# Altium PCB WOLF-Adapter_V2.PcbDoc
Units mm, origin at the board's own origin, x right, y up, seen from the top; angles counter-clockwise.
Board outline 81.7 x 100.2 mm, 2 copper layers (Top Layer, Bottom Layer); 67 components, 74 nets, 317 pads, 127 vias.
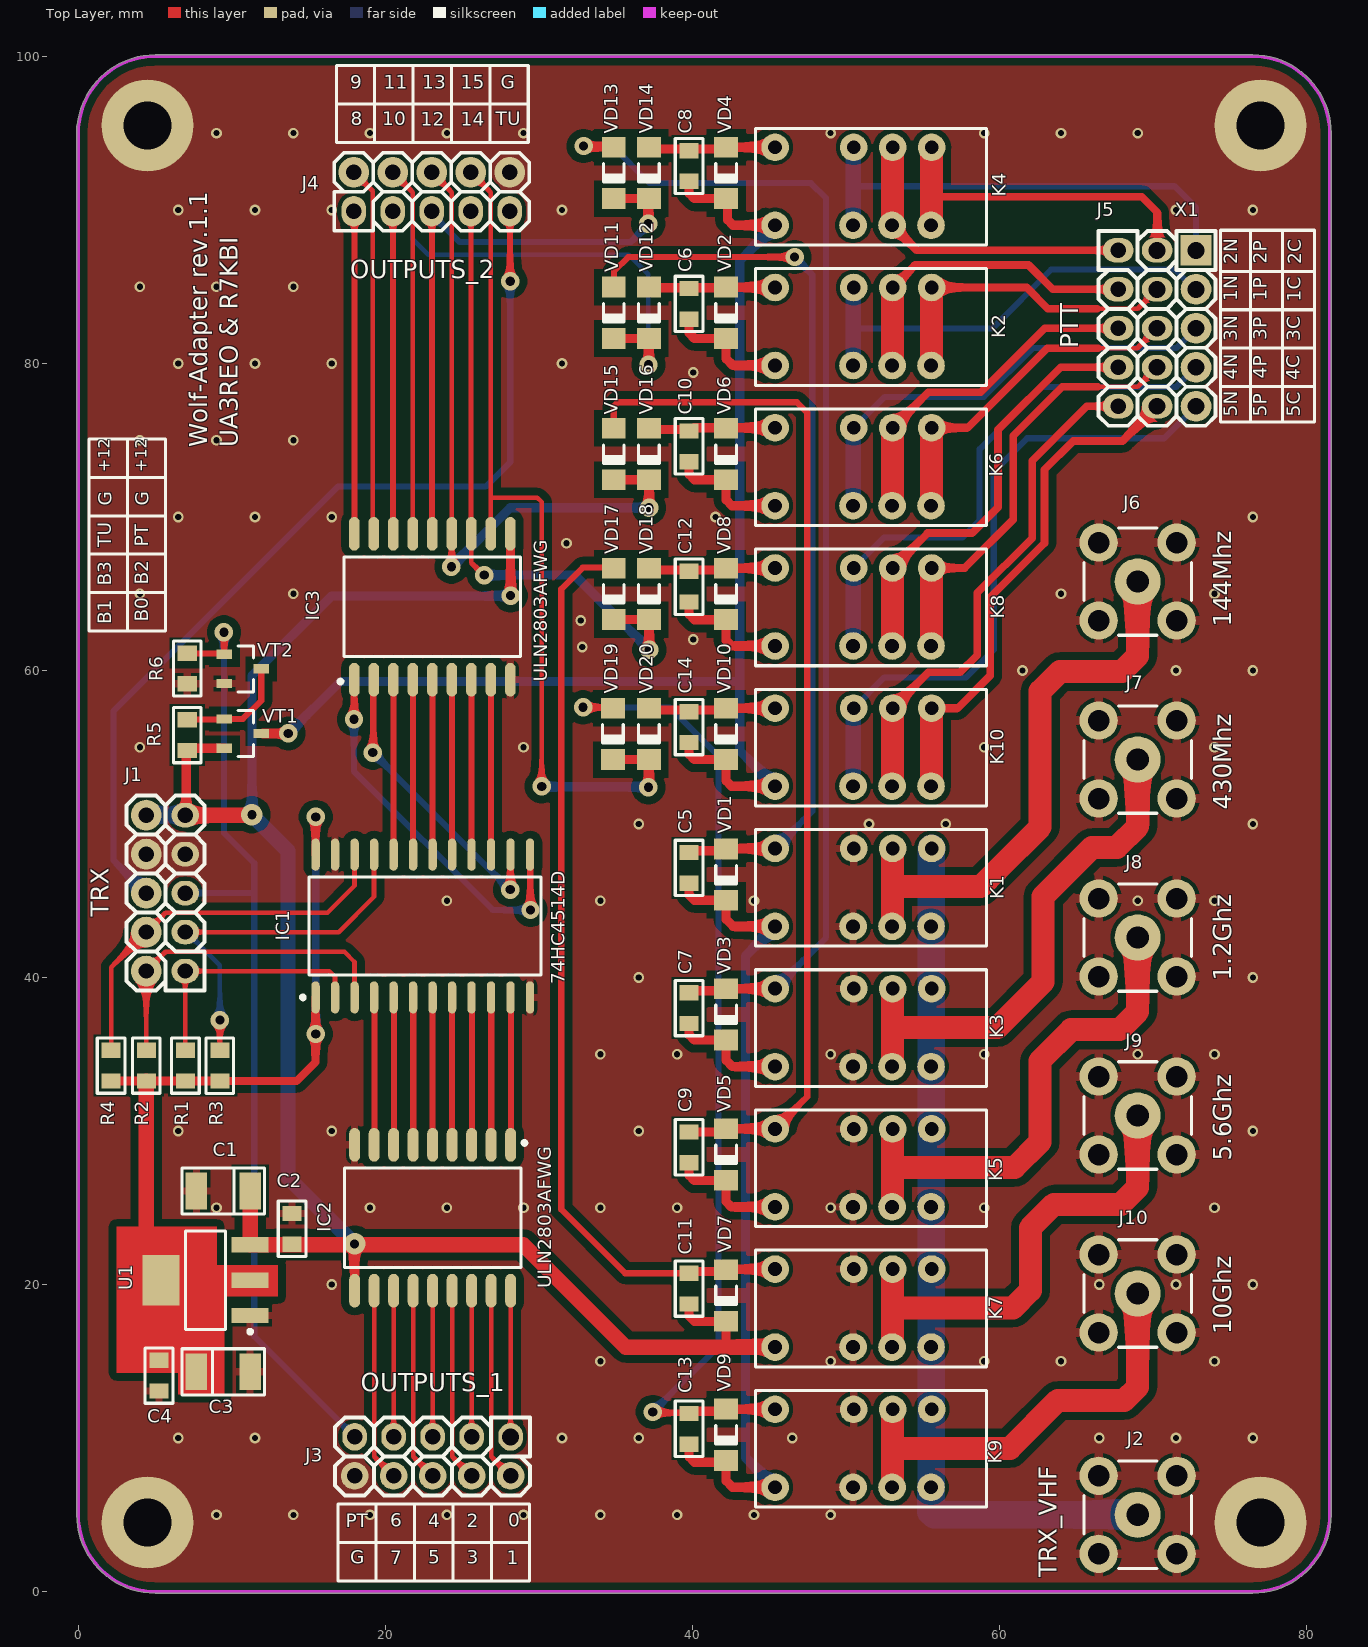
[diagram p0: Top Layer view]
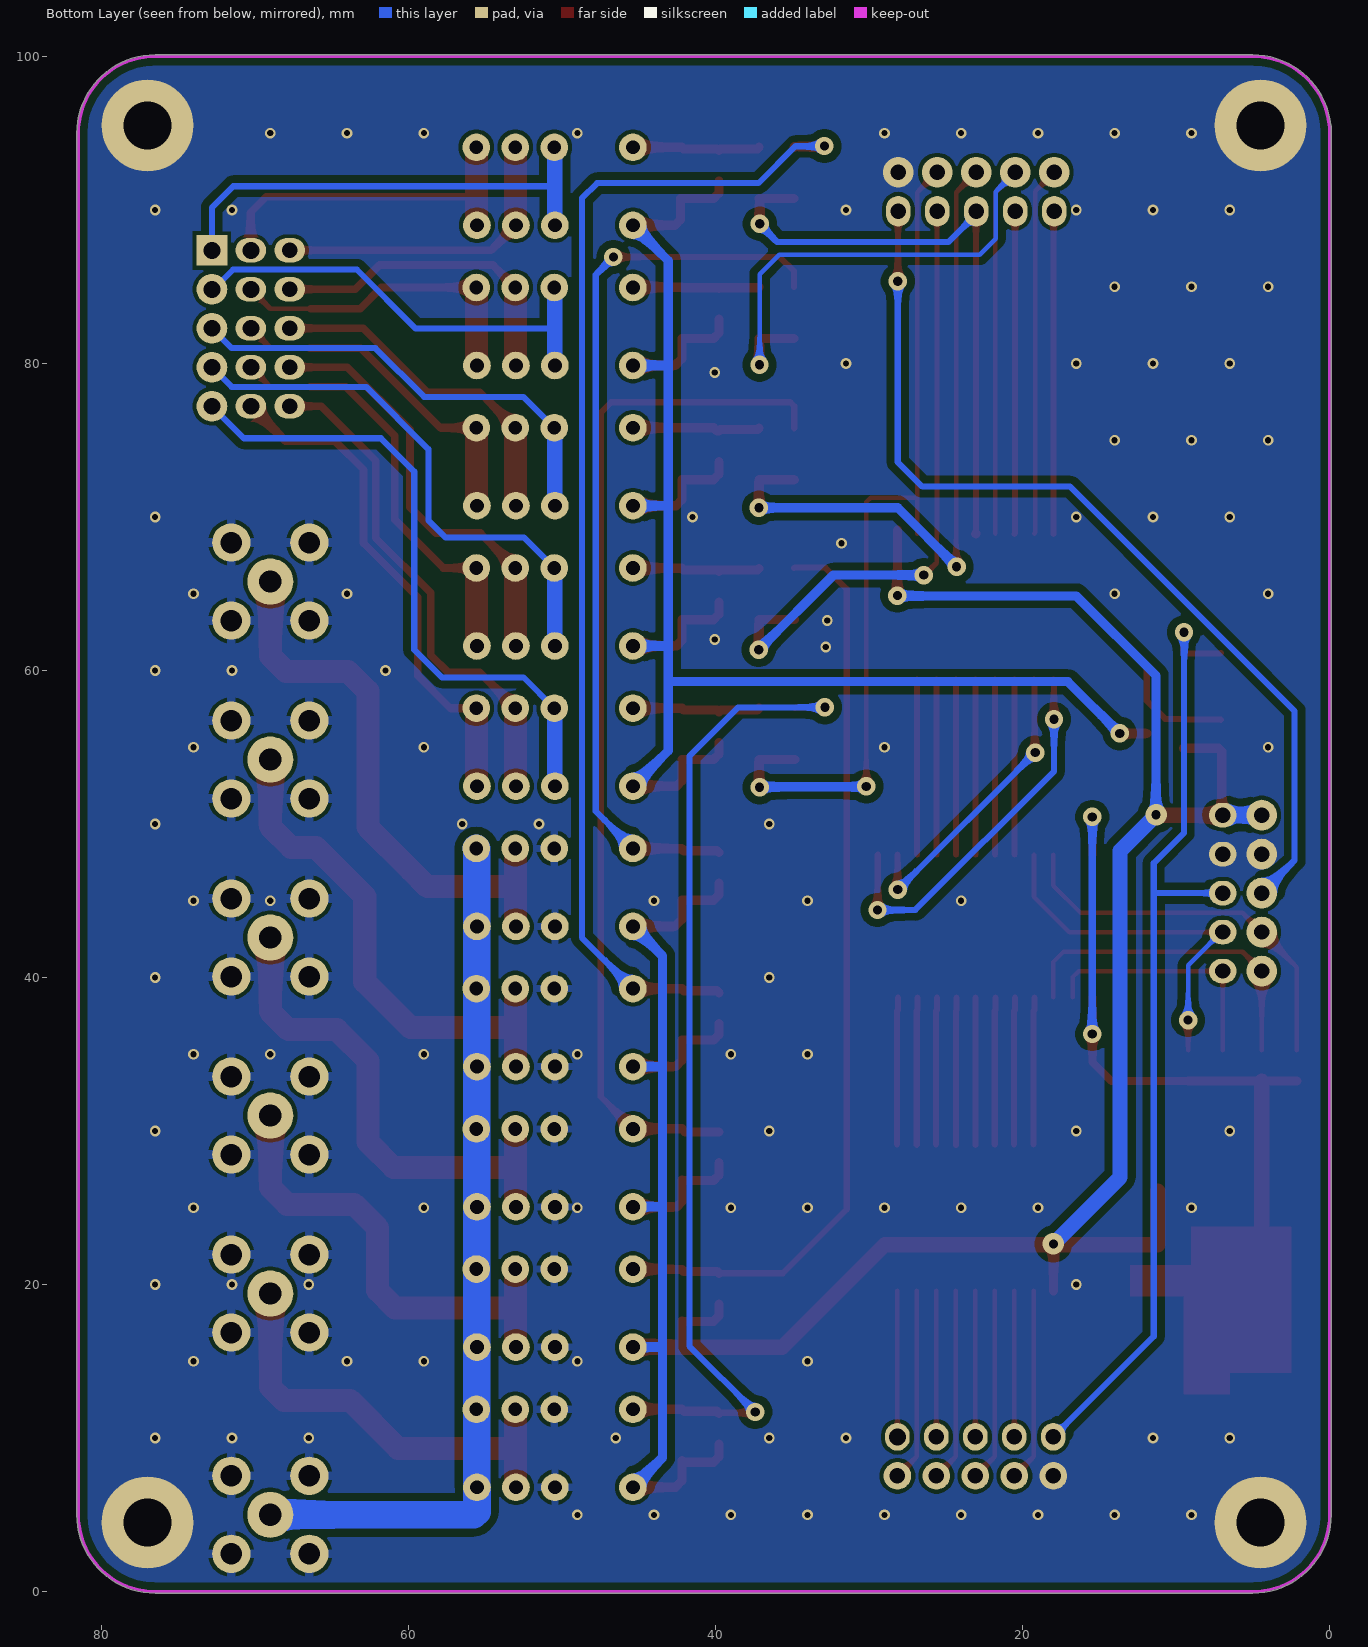
[diagram p1: Bottom Layer view, seen from below]
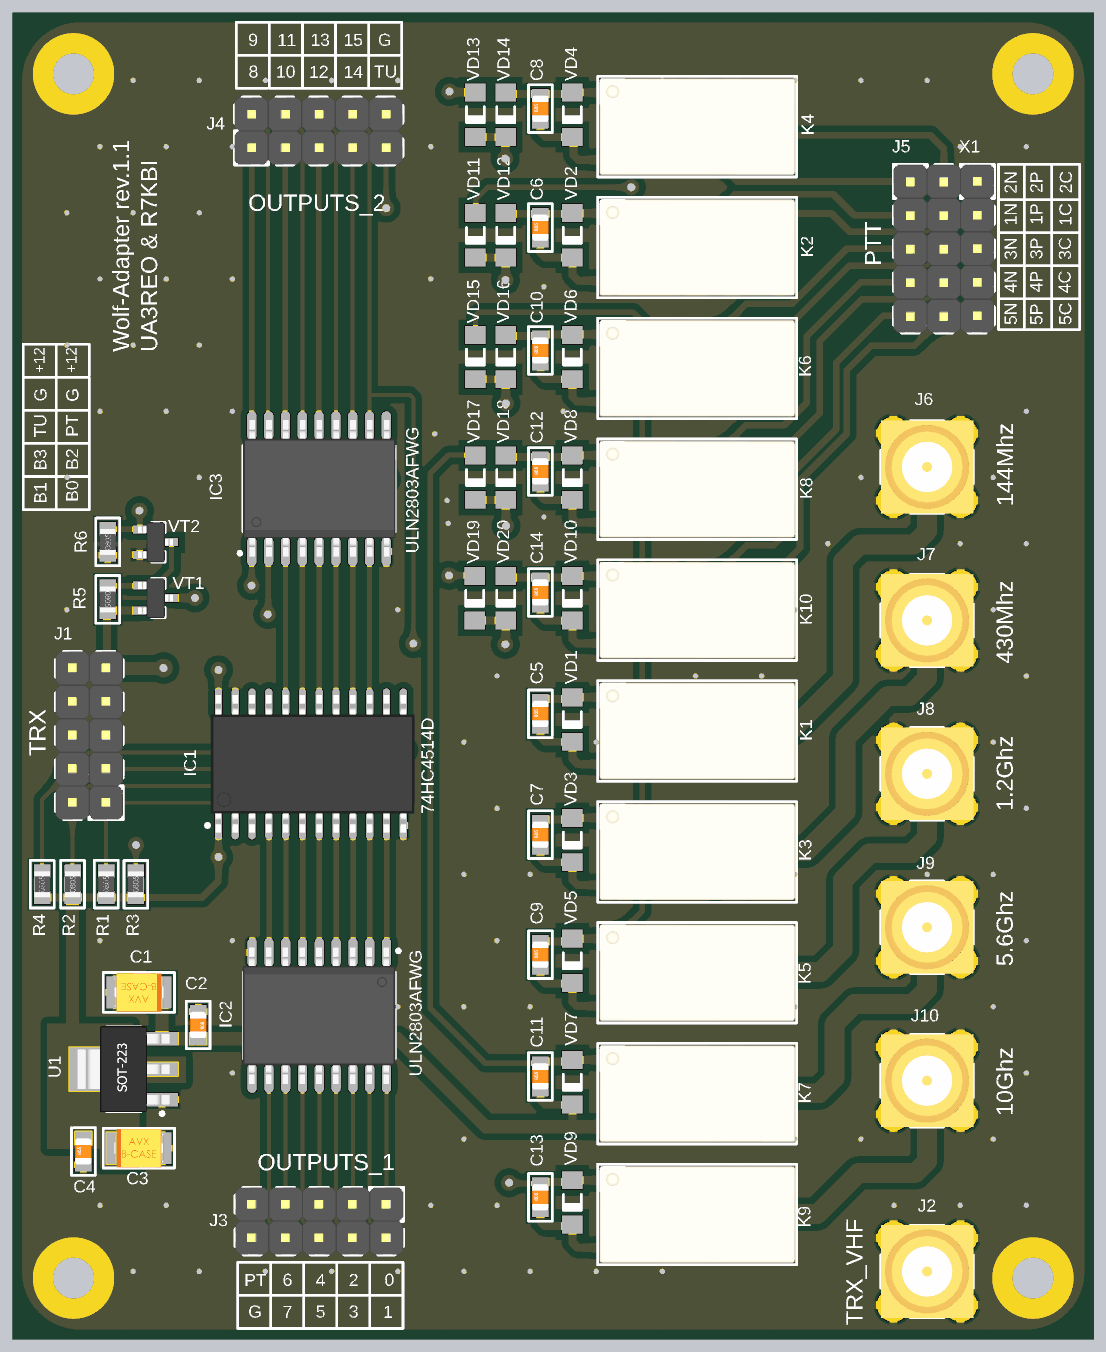
[diagram p2: 3D render of the assembled board from above, using the file's embedded part models]

## Layer stack, top to bottom
Top Solder: solder mask 0.0102, Solder Resist, Dk 3.5
Top Layer: signal copper 0.0356
Dielectric 1: dielectric 0.32, FR-4, Dk 4.8
Bottom Layer: signal copper 0.0356
Bottom Solder: solder mask 0.0102, Solder Resist, Dk 3.5

## Board outline
-0.1,4.999 -0.1,95.469 -0.072,95.539 cw(c5,95) 5,100.1 76.5,100.1 76.501,100.1 cw(c76.5,95) 81.6,95 81.6,5 cw(c76.5,5) 76.5,-0.1 5,-0.1 cw(c5,5)

## Design rules (kind name [scope] priority, off if disabled: settings)
BoardOutlineClearance [All] p1: gap=0.3 ignorepadtopadclearanceinfootprint=FALSE
Clearance POWER [InNetClass('POWER')] p1: gap=0.3 ignorepadtopadclearanceinfootprint=FALSE except(0: Arc-Hole Track-Hole SMDPad-Hole THPad-Hole Via-Hole Fill-Hole Poly-Hole Region-Hole Text-Hole)
Clearance Clearance_NPTH [All vs InPadClass('NPTH')] p2: gap=0.4 ignorepadtopadclearanceinfootprint=FALSE except(0: Arc-Hole Track-Hole SMDPad-Hole THPad-Hole Via-Hole Fill-Hole Poly-Hole Region-Hole Text-Hole)
Clearance Clearance_MultiLayerPad [OnLayer('Multi-Layer') and IsPad] p3: gap=0.25 ignorepadtopadclearanceinfootprint=FALSE except(0: Arc-Hole Track-Hole SMDPad-Hole THPad-Hole Via-Hole Fill-Hole Poly-Hole Region-Hole Text-Hole)
Clearance Clearance_Polygon [InPolygon] p4: gap=0.5 ignorepadtopadclearanceinfootprint=FALSE except(0: Arc-Hole Track-Hole SMDPad-Hole THPad-Hole Via-Hole Fill-Hole Poly-Hole Region-Hole Text-Hole)
Clearance [All] p5: gap=0.3 ignorepadtopadclearanceinfootprint=FALSE except(0: Arc-Hole Track-Hole SMDPad-Hole THPad-Hole Via-Hole Fill-Hole Poly-Hole Region-Hole Text-Hole)
Height [All] p1: minheight=0 maxheight=60 prefheight=12.7
HoleSize [All] p1: absolutevalues=TRUE maxlimit=5 minlimit=0.025 maxpercent=80.000 minpercent=20.000
HoleToHoleClearance [All] p1: gap=0.2 allowstackedmicrovias=TRUE
MinimumSolderMaskSliver [All] p1: minsoldermaskwidth=0.05
PlaneClearance [All] p1: clearance=0.5
PlaneConnect [All] p1: planeconnectstyle=Relief reliefexpansion=0.5 reliefentries=4 reliefconductorwidth=0.3 reliefairgap=0.2
PolygonConnect PolygonConnect_PowerPAD [All vs InPadClass('PowerPAD')] p1: connectstyle=Relief reliefconductorwidth=1 reliefentries=4 polygonreliefangle="90 Angle" airgapwidth=0.3
PolygonConnect PolygonConnect_PadGND [InNet('GND') and IsPad] p2: connectstyle=Relief reliefconductorwidth=0.5 reliefentries=4 polygonreliefangle="90 Angle" airgapwidth=0.2
PolygonConnect PolygonConnect_Via [IsVia] p3: connectstyle=Direct reliefconductorwidth=0.254 reliefentries=4 polygonreliefangle="90 Angle" airgapwidth=0.254
PolygonConnect [All] p4: connectstyle=Relief reliefconductorwidth=0.6 reliefentries=4 polygonreliefangle="90 Angle" airgapwidth=0.3
RoutingVias [All] p1: holewidth=0.3 width=0.7 viastyle="Through Hole" minholewidth=0.3 minwidth=0.6 maxholewidth=3.2 maxwidth=5
SilkToSilkClearance [All] p1: silktosilkclearance=0
SilkToSolderMaskClearance [IsPad] p1: minsilkscreentomaskgap=0.05 clearancetoexposedcopper=FALSE
SolderMaskExpansion [All] p1: expansion=0.075 istentingtop=FALSE
Width [All] p1: maxlimit=10 minlimit=0.15 preferedwidth=0.2
22 further rules are at their usual default settings.

## Components (designator, comment, footprint, x,y, rotation, side; value= is the part's Value field where it differs from the comment)
C1 "10uF" TANTAL_B 9.434,26.09 r180 top
C2 "0.1u" CH0805C 13.916,23.629 r270 top
C3 "10uF" TANTAL_B 9.434,14.317 r0 top
C4 "0.1u" CH0805C 5.248,14.067 r90 top
C5 "100n" CH0805C 39.778,47.139 r90 top
C6 "100n" CH0805C 39.778,83.881 r90 top
C7 "100n" CH0805C 39.778,38.005 r90 top
C8 "100n" CH0805C 39.778,92.865 r90 top
C9 "100n" CH0805C 39.778,28.939 r90 top
C10 "100n" CH0805C 39.778,74.603 r90 top
C11 "100n" CH0805C 39.778,19.737 r90 top
C12 "100n" CH0805C 39.778,65.456 r90 top
C13 "100n" CH0805C 39.778,10.603 r90 top
C14 "100n" CH0805C 39.778,56.312 r90 top
IC1 "74HC4514D" "24-SOIC (W)" 22.432,43.354 r90 top
IC2 "ULN2803AFWG" "18-SOIC (W)" 23.072,24.351 r270 top
IC3 "ULN2803AFWG" "18-SOIC (W)" 23.055,64.153 r90 top locked
J1 "\"TRX\"" "CON: PLD-10"#1 5.685,45.5 r90 top
J2 "\"TRX_VHF\"" "CON: SMA" 69,5 r0 top
J3 "\"OUTPUTS_1\"" "CON: PLD-10"#2 23.072,8.808 r180 top
J4 "\"OUTPUTS_2\"" "CON: PLD-10"#3 23.014,91.184 r0 top
J5 "\"PTT\"" "CON: PLD-10"#4 69,82.289 r270 top
J6 "\"144Mhz\"" "CON: SMA" 69,65.795 r0 top
J7 "\"430Mhz\"" "CON: SMA" 69,54.2 r0 top
J8 "\"1.2Ghz\"" "CON: SMA" 69,42.606 r0 top
J9 "\"5.6Ghz\"" "CON: SMA" 69,31.011 r0 top
J10 "\"10Ghz\"" "CON: SMA" 69,19.416 r0 top
K1 "G6S-2-DС12" G6S-2-DC12 44.24,47.139 r0 top
K2 "G6S-2-DС12" G6S-2-DC12 44.24,83.676 r0 top
K3 "G6S-2-DС12" G6S-2-DC12 44.24,38.005 r0 top
K4 "G6S-2-DС12" G6S-2-DC12 44.24,92.81 r0 top
K5 "G6S-2-DС12" G6S-2-DC12 44.24,28.871 r0 top
K6 "G6S-2-DС12" G6S-2-DC12 44.24,74.542 r0 top
K7 "G6S-2-DС12" G6S-2-DC12 44.24,19.737 r0 top
K8 "G6S-2-DС12" G6S-2-DC12 44.24,65.408 r0 top
K9 "G6S-2-DС12" G6S-2-DC12 44.24,10.603 r0 top
K10 "G6S-2-DС12" G6S-2-DC12 44.24,56.274 r0 top
R1 "1k" CH0805R 6.971,34.262 r90 top
R2 "1k" CH0805R 4.428,34.262 r90 top
R3 "1k" CH0805R 9.213,34.259 r90 top
R4 "1k" CH0805R 2.129,34.262 r90 top
R5 "30k" CH0805R 7.089,55.791 r270 top
R6 "10k" CH0805R 7.089,60.133 r90 top
U1 "LM1117DT-5-5.0" SOT223 8.287,20.284 r180 top
VD1 "1N4148" 1N4148 42.189,46.704 r270 top
VD2 "1N4148" 1N4148 42.189,83.299 r270 top
VD3 "1N4148" 1N4148 42.189,37.598 r270 top
VD4 "1N4148" 1N4148 42.189,92.415 r270 top
VD5 "1N4148" 1N4148 42.189,28.475 r270 top
VD6 "1N4148" 1N4148 42.189,74.1 r270 top
VD7 "1N4148" 1N4148 42.189,19.292 r270 top
VD8 "1N4148" 1N4148 42.189,64.989 r270 top
VD9 "1N4148" 1N4148 42.189,10.214 r270 top
VD10 "1N4148" 1N4148 42.189,55.872 r270 top
VD11 "1N4148" 1N4148 34.87,83.299 r270 top
VD12 "1N4148" 1N4148 37.161,83.299 r270 top
VD13 "1N4148" 1N4148 34.87,92.415 r270 top
VD14 "1N4148" 1N4148 37.161,92.415 r270 top
VD15 "1N4148" 1N4148 34.87,74.1 r270 top
VD16 "1N4148" 1N4148 37.161,74.1 r270 top
VD17 "1N4148" 1N4148 34.87,64.989 r270 top
VD18 "1N4148" 1N4148 37.161,64.989 r270 top
VD19 "1N4148" 1N4148 34.814,55.872 r270 top
VD20 "1N4148" 1N4148 37.161,55.872 r270 top
VT1 "IRLML9301" SOT23_132 10.708,55.891 r0 top
VT2 "BSS123" SOT23_132 10.708,60.108 r0 top
X1 "\"PTT\"" "CON: PLS-5" 72.801,82.289 r270 top

## Footprints (in the part's own frame and the unit in brackets; to place one, negate y for a bottom-side part, rotate by r counter-clockwise, add the part's x,y. Pads: shape width x height; smd on the part's side, far side on the other; paste and mask are expansions set on the pad)
1N4148 [mm] "MELF Diode, 2-Leads, Body 3,60x1,30mm, IPC Medium Density"
  rect 1.35x1.55 smd: 1(-1.675,0) 2(1.675,0)
  silkscreen extent -0.6,-0.67 0.6,0.68, body extent -1.7,-0.7 1.7,0.7, height 1.36
"18-SOIC (W)" [mm] "SOIC, 18-Leads, Body 11,55x7,50mm, Pitch 1,27mm, IPC Medium Density"
  oval 2.2x0.7 smd: 1(-4.75,5.08) 2(-4.75,3.81) 3(-4.75,2.54) 4(-4.75,1.27) 5(-4.75,0) 6(-4.75,-1.27) 7(-4.75,-2.54) 8(-4.75,-3.81) 9(-4.75,-5.08) 10(4.75,-5.08) 11(4.75,-3.81) 12(4.75,-2.54) 13(4.75,-1.27) 14(4.75,0) 15(4.75,1.27) 16(4.75,2.54) 17(4.75,3.81) 18(4.75,5.08)
  round 0.7 on Mech1: 32(-4.5,5.1)
  silkscreen extent -5,-5.75 3.25,6.11, body extent -5.12,-5.79 5.18,5.74, height 2.65
"24-SOIC (W)" [mm] "SOIC, 24-Leads, Body 15,30x7,55mm, Pitch 1,27mm, IPC Medium Density"
  oval 2.1x0.55 smd: 1(-4.65,6.985) 2(-4.65,5.715) 3(-4.65,4.445) 4(-4.65,3.175) 5(-4.65,1.905) 6(-4.65,0.635) 7(-4.65,-0.635) 8(-4.65,-1.905) 9(-4.65,-3.175) 10(-4.65,-4.445) 11(-4.65,-5.715) 12(-4.65,-6.985) 13(4.65,-6.985) 14(4.65,-5.715) 15(4.65,-4.445) 16(4.65,-3.175) 17(4.65,-1.905) 18(4.65,-0.635) 19(4.65,0.635) 20(4.65,1.905) 21(4.65,3.175) 22(4.65,4.445) 23(4.65,5.715) 24(4.65,6.985)
  round 0.5 on Mech1: ""(-4.6,6.9)
  silkscreen extent -4.77,-7.7 3.2,7.93, body extent -5.2,-7.83 5.2,7.57, height 2.6
CH0805C [mm] "Chip Capacitor, 2-Leads, Body 2,00x1,20mm, IPC Medium Density"
  rect 1x1.25 smd: 1(-1,0) 2(1,0)
  silkscreen extent -1.8,-0.9 1.8,0.9, body extent -1,-0.62 1,0.63, height 0.78
CH0805R [mm]
  rect 1x1.25 smd: 1(-1,0) 2(1,0)
  silkscreen extent -1.8,-0.9 1.8,0.9, body extent -1,-0.6 1,0.6, height 0.44
"CON: PLD-10"#1 [mm]
  oval 1.6x1.8 hole 1: 1(-5.08,-1.27) 3(-2.54,-1.27) 5(0,-1.27) 7(2.54,-1.27) 9(5.08,-1.27)
  round 2 hole 1: 2(-5.08,1.27) 4(-2.54,1.27) 6(0,1.27) 8(2.54,1.27) 10(5.08,1.27)
  silkscreen extent -6.35,-2.54 6.35,2.54, body extent -6.35,-2.54 6.35,2.54, height 8.54
"CON: PLD-10"#2 [mm]
  oval 1.6x1.8 hole 1.1: 1(-5.08,-1.27)
  round 1.8 hole 1: 2(-5.08,1.27) 4(-2.54,1.27) 6(0,1.27) 8(2.54,1.27) 10(5.08,1.27)
  oval 1.6x1.8 hole 1: 3(-2.54,-1.27) 5(0,-1.27) 7(2.54,-1.27) 9(5.08,-1.27)
  silkscreen extent -6.35,-2.54 6.35,2.54, body extent -6.35,-2.54 6.35,2.54, height 8.54
"CON: PLD-10"#3 [mm]
  oval 1.6x2 hole 1: 1(-5.08,-1.27) 3(-2.54,-1.27) 5(0,-1.27) 7(2.54,-1.27) 9(5.08,-1.27)
  round 2 hole 1: 2(-5.08,1.27) 4(-2.54,1.27) 6(0,1.27) 8(2.54,1.27) 10(5.08,1.27)
  silkscreen extent -6.35,-2.54 6.35,2.54, body extent -6.35,-2.54 6.35,2.54, height 8.54
"CON: PLD-10"#4 [mm]
  oval 1.6x2 hole 1: 1(-5.08,-1.27) 3(-2.54,-1.27) 5(0,-1.27) 7(2.54,-1.27) 9(5.08,-1.27)
  oval 1.6x2 hole 1.1: 2(-5.08,1.27) 4(-2.54,1.27) 6(0,1.27) 8(2.54,1.27) 10(5.08,1.27)
  silkscreen extent -6.35,-2.54 6.35,2.54, body extent -6.35,-2.54 6.35,2.54, height 8.54
"CON: PLS-5" [mm]
  rect 2x2 hole 1.1: 1(-5.08,0)
  round 2 hole 1.1: 2(-2.54,0) 3(0,0) 4(2.54,0) 5(5.08,0)
  silkscreen extent -6.35,-1.27 6.35,1.27, body extent -6.35,-1.27 6.35,1.27, height 8.54
"CON: SMA" [mm]
  round 3 hole 1.45: 1(0,0)
  round 2.5 hole 1.4: 2(-2.54,-2.54) 2(-2.54,2.54) 2(2.54,-2.54) 2(2.54,2.54)
  silkscreen extent -3.5,-3.5 3.5,3.5, body extent -3.5,-3.5 3.5,3.5, height 9.53
G6S-2-DC12 [mm]
  round 1.8 hole 0.9: 1(1.14,1.27) 3(6.261,1.27) 4(8.801,1.27) 5(11.341,1.27) 8(11.3,-3.81) 9(8.76,-3.81) 10(6.22,-3.81) 12(1.14,-3.81)
  silkscreen extent -0.14,-5.1 14.9,2.5, body extent 0,-4.95 14.8,2.35, height 8.55
SOT23_132 [mm] "SOT23, 3-Leads, Body 3,0x2,6mm (max), Pitch 0,95mm, IPC Medium Density"
  rect 1x0.6 smd: 1(-1.2,0.95) 2(-1.2,-0.95) 3(1.2,0)
  round 0.5 on Mech1: ""(-0.9,1.1)
  silkscreen extent -0.3,-1.5 0.7,1.5, body extent -1.32,-1.52 1.32,1.52, height 1.12
SOT223 [mm] "SOT223, 4-Leads, Body 6,50x7,00mm (avg), Pitch 2,30mm, IPC Medium Density"
  rect 2.4x1 smd: 1(-2.9,2.3) 2(-2.9,0) 3(-2.9,-2.3)
  rect 2.4x3.3 smd: 4(2.9,0)
  round 0.5 on Mech1: ""(-3,2.7)
  silkscreen extent -3.03,-3.2 1.3,3.47, body extent -3.48,-3.25 3.48,3.25, height 1.65
TANTAL_B [mm]
  rect 1.4x2.4 smd: 1(-1.75,0) 2(1.75,0)
  round 0.5 on Mech1: ""(-1.4,1)
  silkscreen extent -2.7,-1.5 2.7,1.5, body extent -1.85,-1.46 1.85,1.47, height 2.03

## Part data
C1 C3: library part TantalCap
C2 C4 C5 C6 C7 C8 C9 C10 C11 C12 C13 C14: library part Capacitor
J1 J3 J4 J5: library part 10-Connector
J2 J6 J7 J8 J9 J10: library part SMA, "RF"
K1 K2 K3 K4 K5 K6 K7 K8 K9 K10: library part G6S-2_TRS
R1 R2 R3 R4 R5 R6: library part Resistor
U1: library part AMS117
VD1 VD2 VD3 VD4 VD5 VD6 VD7 VD8 VD9 VD10 VD11 VD12 VD13 VD14 VD15 VD16 VD17 VD18 VD19 VD20: library part Diod
VT1: library part P-KANAL
VT2: library part N-KANAL
X1: library part 5-Connector

## Free pads (board coordinates)
  round 6 hole 3.1: 0(4.5,4.5) 0(4.5,95.5) 0(77,4.5) 0(77,95.5)

## Via types
v1: diameter 0.7, hole 0.4, Top Layer to Bottom Layer, tented both sides, 102 vias
v2: diameter 1.2, hole 0.6, Top Layer to Bottom Layer, tented both sides, 23 vias
v3: diameter 1.4, hole 0.6, Top Layer to Bottom Layer, tented both sides, 2 vias

## Nets (pads, with @x,y where several pads share a name; then routed paths per layer and width w, separated by ;. In a path a pad name is that pad's centre, name@x,y a point inside that pad or via, vN(x,y) a via of type N, cw(c..) or ccw(c..) an arc to the next point about the centre after c; other vN are vias at no path point)
+5V: C3.1 C4.2 IC1.1 IC1.24 R1.1 R2.1 R3.1 R4.1 U1.2 U1.4 | length 50.7
  Top Layer w0.5: R3.1 14.209,33.259 15.447,34.497 IC1.1 ; IC1.24 15.447,50.397 v2@15.45,50.4
  Top Layer w0.6: R4.1 2.13,33.26 4.428,33.26 9.211,33.26 R3.1
  Top Layer w1: R2.1 4.428,33.26 4.428,22.997 4.5,22.925 ; U1.4 U1.2
  Bottom Layer w0.5: v2(15.46,36.321) v2(15.46,50.46)
+12V: C1.1 C2.2 C5.1 C7.1 C9.1 C11.1 C13.1 IC2.10 IC3.10 J1.9 J1.10 K1.12 K3.12 K5.12 K7.12 K9.12 R5.2 U1.3 VD1.2 VD3.2 VD5.2 VD7.2 VD9.2 VT1.2 | length 200.9
  Top Layer w0.6: J1.9@6.97,50.565 J1.9 7.022,50.647 7.022,54.724 R5.2 7.239,54.941 VT1.2 ; v3@11.285,50.565 v3@11.3,50.55 ; IC2.10 v3(17.992,22.642) ; IC3.10@28.139,69.141 28.144,69.135 28.144,64.966 v2@28.153,64.957 ; C13.1 39.778,8.776 40.13,8.425 42.075,8.425 VD9.2 42.189,7.211 42.607,6.793 K9.12 ; C11.1 39.778,17.951 40.13,17.6 42.171,17.6 VD7.2 42.189,16.386 ; C9.1 39.778,27.126 40.13,26.775 42.163,26.775 VD5.2 42.189,25.401 42.54,25.05 45.369,25.05 K5.12 ; C7.1 39.778,36.274 40.13,35.923 VD3.2 42.189,34.611 42.605,34.195 K3.12 ; C5.1 39.778,45.38 40.13,45.029 VD1.2 42.189,43.786 42.646,43.329 K1.12
  Top Layer w1: J1.9@6.97,50.565 v3@11.285,50.565 ; C1.1 11.186,26.089 U1.3 U1.3 17.88,22.584 17.938,22.642 v3(17.992,22.642) ; v3@18.044,22.59 28.985,22.59 35.648,15.927 42.648,15.927 K7.12
  Bottom Layer w0.6: v3@11.3,50.55 v3(11.3,50.6) 11.3,59.66 16.497,64.857 28.053,64.857 v2@28.153,64.957 ; K9.12 43.45,8.723 43.45,15.925 ; K7.12 43.452,15.927 43.45,15.925 ; K5.12 43.461,25.061 43.45,25.05 ; K3.12 43.495,34.195 43.45,34.15 ; K1.12 43.45,41.399 43.45,34.15 ; 43.45,15.925 43.45,25.05 ; 43.45,25.05 43.45,34.15
  Bottom Layer w1: J1.10@4.746,50.6 J1.9@7.286,50.6 ; v3(11.3,50.6) 13.65,48.25 13.65,26.984 v3(17.992,22.642)
  other v2: 28.153,64.882
BAND_0: IC1.2 J1.1 R1.2 | length 16.4
  Top Layer w0.3: R1.2 6.955,35.277 J1.1 16.33,40.42 16.717,40.033 IC1.2
BAND_1: IC1.3 J1.2 R2.2 | length 21.8
  Top Layer w0.3: R2.2 4.415,35.275 J1.2 5.665,41.67 17.33,41.67 17.987,41.013 IC1.3
BAND_2: IC1.21 J1.3 R3.2 | length 24.4
  Top Layer w0.3: J1.3 16.96,42.96 19.257,45.257 IC1.21 ; v2@9.2,36.975 9.213,36.962 R3.2
  Bottom Layer w0.3: J1.3 7.055,42.96 9.219,40.797 v2(9.219,37.229)
BAND_3: IC1.22 J1.4 R4.2 | length 25.5
  Top Layer w0.3: R4.2 2.129,40.674 J1.4 5.68,44.225 16.225,44.225 17.987,45.987 IC1.22
CH_0: IC1.11 IC2.1 | length 9.6
  Top Layer w0.3: IC2.1@28.137,29.116 IC2.1
  Top Layer w0.4: IC1.11@28.122,38.704 28.122,37.888 28.177,37.833 IC2.1@28.177,29.127
CH_1: IC1.10 IC2.2 | length 9.6
  Top Layer w0.3: IC2.2@26.867,29.116 IC2.2
  Top Layer w0.4: IC1.10@26.852,38.704 26.852,37.888 26.888,37.852 IC2.2@26.888,29.107
CH_2: IC1.9 IC2.3 | length 9.6
  Top Layer w0.3: IC2.3@25.597,29.116 IC2.3
  Top Layer w0.4: IC1.9@25.582,38.704 25.582,37.888 25.63,37.84 IC2.3@25.63,29.119
CH_3: IC1.8 IC2.4 | length 9.6
  Top Layer w0.3: IC2.4@24.327,29.116 IC2.4
  Top Layer w0.4: IC1.8@24.312,38.704 24.312,37.888 24.344,37.856 IC2.4@24.344,29.103
CH_4: IC1.7 IC2.5 | length 9.6
  Top Layer w0.3: IC1.7@23.042,38.704 IC1.7@23.057,38.689 ; IC2.5@23.057,29.116 IC2.5
  Top Layer w0.4: IC2.5@23.067,29.106 IC1.7@23.067,38.678
CH_5: IC1.6 IC2.6 | length 9.6
  Top Layer w0.3: IC2.6@21.787,29.116 IC2.6
  Top Layer w0.4: IC1.6@21.772,38.704 21.772,37.888 21.813,37.847 IC2.6@21.813,29.113
CH_6: IC1.5 IC2.7 | length 9.6
  Top Layer w0.3: IC2.7@20.517,29.116 IC2.7
  Top Layer w0.4: IC1.5@20.502,38.704 20.502,37.888 20.55,37.84 IC2.7@20.55,29.119
CH_7: IC1.4 IC2.8 | length 9.6
  Top Layer w0.3: IC2.8@19.247,29.116 IC2.8
  Top Layer w0.4: IC1.4@19.232,38.704 19.232,37.888 19.282,37.839 IC2.8@19.282,29.121
CH_8: IC1.18 IC3.5 | length 11.4
  Top Layer w0.4: IC3.5 23.061,59.397 23.061,48.01 IC1.18
CH_9: IC1.17 IC3.6 | length 11.4
  Top Layer w0.4: IC3.6 24.331,59.397 24.331,48.01 IC1.17
CH_10: IC1.20 IC3.3 | length 11.4
  Top Layer w0.4: IC3.3 20.521,59.397 20.521,48.01 IC1.20
CH_11: IC1.19 IC3.4 | length 11.4
  Top Layer w0.4: IC3.4 21.791,59.397 21.791,48.01 IC1.19
CH_12: IC1.14 IC3.2 | length 19.7
  Top Layer w0.4: v2(19.175,54.65) 19.21,54.685 19.21,59.368 IC3.2 ; v2(28.125,45.725) 28.136,45.736 28.136,47.993 IC1.14
  Bottom Layer w0.4: v2(19.175,54.65) 19.188,54.65 28.112,45.725 v2(28.125,45.725)
CH_13: IC1.13 IC3.1 | length 24.8
  Top Layer w0.4: v2(17.95,56.825) 17.962,56.837 17.962,59.391 IC3.1 ; IC1.13 29.434,47.987 29.434,44.416 v2(29.45,44.4)
  Bottom Layer w0.4: v2(17.95,56.825) 17.95,53.425 26.975,44.4 v2(29.45,44.4)
CH_14: IC1.16 IC3.7 | length 11.4
  Top Layer w0.4: IC3.7 25.601,59.397 25.601,48.01 IC1.16
CH_15: IC1.15 IC3.8 | length 11.4
  Top Layer w0.4: IC3.8 26.871,59.397 26.871,48.01 IC1.15
GND: C1.2 C2.1 C3.2 C4.1 IC1.12 IC1.23 IC2.9 IC3.9 J1.7 J1.8 J2.2 J3.10 J4.10 J6.2 J7.2 J8.2 J9.2 J10.2 K1.3 K1.10 K3.3 K3.10 K5.3 K5.10 K7.3 K7.10 K9.3 K9.10 pad.0 R6.1 U1.1 VT2.2
  other v1: 9,5 14,5 19,5 24,5 29,5 34,5 39,5 44,5 49,5 6.5,10 11.5,10 31.5,10 36.5,10 46.5,10 66.5,10 71.5,10 76.5,10 34,15 49,15 59,15 64,15 74,15 16.5,20 66.5,20 71.5,20 76.5,20 9,25 19,25 24,25 29,25 34,25 39,25 49,25 59,25 74,25 6.5,30 16.5,30 36.5,30 76.5,30 34,35 39,35 49,35 59,35 69,35 74,35 36.5,40 76.5,40 24,45 34,45 44,45 69,45 74,45 36.5,50 51.5,50 56.5,50 76.5,50 4,55 29,55 59,55 74,55 61.5,60 71.5,60 76.5,60 32.815,61.53 40.047,62.012 32.722,63.262 4,65 14,65 64,65 74,65 31.797,68.287 6.5,70 11.5,70 16.5,70 41.5,70 76.5,70 4,75 9,75 14,75 40.051,79.41 6.5,80 11.5,80 16.5,80 31.5,80 4,85 9,85 14,85 6.5,90 11.5,90 16.5,90 31.5,90 71.5,90 76.5,90 9,95 14,95 19,95 24,95 29,95 49,95 59,95 64,95 69,95
NetC5_2: C5.2 K1.1 VD1.1 VD11.1 | length 58.9
  Top Layer w0.4: VD11.1@34.886,84.974 34.886,86.011 35.807,86.932 v2(46.649,86.932)
  Top Layer w0.6: C5.2 39.898,48.259 42.069,48.259 VD1.1 42.204,48.394 45.364,48.394 K1.1
  Bottom Layer w0.4: K1.1 47.8,50.83 47.8,85.781 v2(46.649,86.932)
NetC6_2: C6.2 K2.1 VD2.1 VD12.1 | length 8.3
  Top Layer w0.6: VD12.1 37.208,84.927 39.732,84.927 C6.2 39.825,84.927 42.142,84.927 VD2.1 42.202,84.96 45.366,84.96 K2.1
NetC7_2: C7.2 K3.1 VD3.1 VD13.1 | length 77.8
  Top Layer w0.6: v2(32.904,94.163) 32.94,94.126 34.849,94.126 VD13.1@34.886,94.09 ; C7.2 39.912,39.139 42.055,39.139 VD3.1 42.19,39.274 45.378,39.274 K3.1
  Bottom Layer w0.4: v2@32.925,94.15 34.8,94.15 37.2,91.75 47.71,91.75 48.7,90.76 48.7,42.596 K3.1
NetC8_2: C8.2 K4.1 VD4.1 VD14.1 | length 8.4
  Top Layer w0.6: VD14.1@37.161,94.087 37.272,93.976 39.668,93.976 C8.2 39.889,93.976 42.078,93.976 42.189,94.087 42.192,94.084 45.377,94.084 K4.1
NetC9_2: C9.2 K5.1 VD5.1 VD15.1 | length 67.7
  Top Layer w0.4: VD15.1 34.875,75.78 34.875,77.225 35.125,77.475 46.8,77.475 47.475,76.8 47.475,73.717 47.475,32.237 K5.1 ; C9.2@39.763,29.924 C9.2 ; VD5.1@41.977,29.939 VD5.1
  Top Layer w0.6: C9.2 VD5.1@41.977,29.939 ; VD5.1 42.193,30.146 45.376,30.146 K5.1
NetC10_2: C10.2 K6.1 VD6.1 VD16.1 | length 8.4
  Top Layer w0.6: VD16.1 37.247,75.689 39.693,75.689 C10.2 39.903,75.603 40.113,75.812 K6.1
NetC11_2: C11.2 K7.1 VD7.1 VD17.1 | length 60.2
  Top Layer w0.4: VD17.1 34.834,66.7 32.85,66.7 31.45,65.3 31.45,24.9 35.613,20.737 C11.2
  Top Layer w0.6: C11.2 39.893,20.852 42.074,20.852 VD7.1 42.209,20.987 45.36,20.987 K7.1
NetC12_2: C12.2 K8.1 VD8.1 VD18.1 | length 8.4
  Top Layer w0.6: VD18.1@37.161,66.652 37.259,66.554 39.681,66.554 C12.2 39.876,66.554 42.091,66.554 42.189,66.652 42.202,66.665 45.367,66.665 K8.1
NetC13_2: C13.2 K9.1 VD9.1 VD19.1 | length 64.7
  Top Layer w0.4: v2(32.875,57.6) 34.761,57.6 VD19.1 ; v2(37.414,11.7) 37.462,11.652 39.73,11.652 C13.2
  Top Layer w0.6: C13.2 39.921,11.746 42.046,11.746 VD9.1 42.196,11.881 45.372,11.881 K9.1
  Bottom Layer w0.4: v2(32.875,57.6) 38.525,57.6 41.7,54.425 41.7,15.986 v2(37.414,11.7)
NetC14_2: C14.2 K10.1 VD10.1 VD20.1 | length 8.4
  Top Layer w0.6: VD20.1 37.279,57.43 39.661,57.43 C14.2 39.896,57.43 42.071,57.43 VD10.1 42.19,57.546 45.378,57.546 K10.1
NetJ2_1: J2.1 K1.5 K1.8 K3.5 K3.8 K5.5 K5.8 K7.5 K7.8 K9.5 K9.8 | length 56.8
  Bottom Layer w1.8: K1.5 55.561,48.389 55.561,39.276 55.561,30.142 55.561,15.927 55.561,6.814 K9.8 55.54,5.21 55.75,5 J2.1
NetR5_1: R5.1 VT1.1 VT2.3 | length 7.4
  Top Layer w0.4: R5.1 7.114,56.816 9.483,56.816 VT1.1 10.716,56.841 11.908,58.033 VT2.3
OUT_0: IC2.18 J3.1 | length 9.5
  Top Layer w0.3: J3.1 IC2.18
OUT_1: IC2.17 J3.2 | length 12.6
  Top Layer w0.3: IC2.17 26.882,8.808 J3.2
OUT_2: IC2.16 J3.3 | length 9.5
  Top Layer w0.3: J3.3 IC2.16
OUT_3: IC2.15 J3.4 | length 12.6
  Top Layer w0.3: IC2.15 24.342,8.808 J3.4
OUT_4: IC2.14 J3.5 | length 9.5
  Top Layer w0.3: J3.5 IC2.14
OUT_5: IC2.13 J3.6 | length 12.6
  Top Layer w0.3: IC2.13 21.802,8.808 J3.6
OUT_6: IC2.12 J3.7 | length 9.5
  Top Layer w0.3: J3.7 IC2.12
OUT_7: IC2.11 J3.8 | length 12.6
  Top Layer w0.3: IC2.11 19.262,8.808 J3.8
OUT_8: IC3.18 J4.1 | length 21
  Top Layer w0.4: IC3.18 J4.1@17.975,89.914
OUT_9: IC3.17 J4.2 | length 24.1
  Top Layer w0.3: J4.2 19.184,91.204 19.184,68.964 IC3.17
OUT_10: IC3.16 J4.3 | length 21
  Top Layer w0.4: J4.3@20.494,89.914 20.494,68.924 IC3.16
OUT_11: IC3.15 J4.4 VD11.2 VD12.2 | length 55
  Top Layer w0.3: J4.4 21.785,91.143 IC3.15
  Top Layer w0.6: VD11.2@34.886,81.624 VD12.2 37.148,81.61 37.148,79.931 v2(37.134,79.917)
  Bottom Layer w0.3: J4.4 21.75,91.178 21.75,88.125 22.8,87.075 35.85,87.075 37.125,85.8 v2@37.125,80.05
OUT_12: IC3.14 J4.5 VD13.2 VD14.2 | length 40.6
  Top Layer w0.4: IC3.14@23.036,68.922 J4.5@23.036,89.892
  Top Layer w0.6: J4.5 J4.5@23.036,89.892 ; IC3.14@23.036,68.922 IC3.14 ; VD13.2@34.886,90.74 VD14.2 ; v2(37.115,89.1) VD14.2@37.115,90.691
  Bottom Layer w0.4: J4.5 23.014,89.714 24.828,87.9 35.975,87.9 v2@37.225,89.15
OUT_13: IC3.13 J4.6 VD15.2 VD16.2 | length 44.4
  Top Layer w0.3: J4.6 24.325,91.143 IC3.13 v2@24.325,67
  Top Layer w0.6: VD15.2 VD16.2 37.161,70.764 v2@37.175,70.75
  Bottom Layer w0.6: v2(24.298,66.762) 28.134,70.598 v2(37.172,70.598)
OUT_14: IC3.12 J4.7 VD17.2 VD18.2 | length 41.2
  Top Layer w0.3: J4.7 25.574,89.893 25.574,68.924 IC3.12 25.595,67.005 v2@26.475,66.125
  Top Layer w0.6: VD17.2 VD18.2 37.161,61.336 v2@37.15,61.325
  Bottom Layer w0.6: v2(26.432,66.216) 32.316,66.216 v2(37.187,61.345)
OUT_15: IC3.11 J4.8 VD19.2 VD20.2 | length 57.1
  Top Layer w0.3: J4.8 26.865,91.143 26.865,71.25 ; IC3.11 26.865,71.25 ; v2(30.175,52.45) 30.175,70.975 29.9,71.25 26.865,71.25
  Top Layer w0.6: VD19.2 VD20.2 37.161,52.536 v2@37.125,52.5
  Bottom Layer w0.6: v2(30.175,52.45) 30.205,52.42 37.097,52.42 v2(37.127,52.391)
PTT: J1.5 J3.9 R6.2 VT2.1 | length 64.1
  Top Layer w0.4: R6.2 7.126,61.095 9.47,61.095 VT2.1 9.508,62.242 v2@9.5,62.25
  Bottom Layer w0.4: J1.5 11.35,45.5 11.45,45.4 ; v2(9.48,62.49) 9.475,62.485 9.475,49.425 11.45,47.45 11.45,45.4 ; J3.9 11.45,16.62 11.45,45.4
PTT_1N: J5.3 K2.4 K2.9 | length 21
  Top Layer w0.5: K2.4 54.508,86.413 61.887,86.413 63.471,84.829 J5.3
  Top Layer w1.5: K2.9 53.021,79.886 53.021,84.926 K2.4
PTT_1P: J5.4 K2.5 K2.8 | length 20.9
  Top Layer w0.3: 66.346,83.521 66.4,83.575 69.016,83.575 J5.4
  Top Layer w0.5: K2.5 61.779,84.946 63.154,83.571 66.346,83.571
  Top Layer w1.5: K2.8 55.561,79.886 55.561,84.926 K2.5
PTT_1С: K2.3 K2.10 X1.2 | length 29.7
  Bottom Layer w0.4: 50.35,83 50.481,83 ; 50.481,82.275 59.525,82.275 63.369,86.119 71.414,86.119 72.704,84.829 X1.2
  Bottom Layer w1: K2.10 50.481,79.886 50.481,82.275 50.481,83 50.481,84.926 K2.3
PTT_2N: J5.1 K4.4 K4.9 | length 20.5
  Top Layer w0.5: K4.9 54.631,87.369 J5.1
  Top Layer w1.5: K4.9 53.021,89.021 53.021,94.06 K4.4
PTT_2P: J5.2 K4.5 K4.8 | length 22.7
  Top Layer w0.5: 55.561,90.848 69.264,90.848 70.27,89.842 J5.2
  Top Layer w1.5: K4.8 55.561,89.021 55.561,90.848 55.561,94.06 K4.5
PTT_2С: K4.3 K4.10 X1.1 | length 30.8
  Bottom Layer w0.4: 50.481,91.54 71.41,91.54 72.801,90.149 X1.1
  Bottom Layer w1: K4.10 50.481,89.021 50.481,91.54 50.481,94.06 K4.3
PTT_3N: J5.5 K6.4 K6.9 | length 22.5
  Top Layer w0.5: K6.4 55.354,78.125 58.775,78.125 62.939,82.289 J5.5
  Top Layer w1.5: K6.9 53.021,70.752 53.021,75.792 K6.4
PTT_3P: J5.6 K6.5 K6.8 | length 22.5
  Top Layer w0.3: 66.425,81 68.981,81 J5.6
  Top Layer w0.5: K6.5 57.927,75.812 63.114,81 66.425,81
  Top Layer w1.5: K6.8 55.561,70.752 55.561,75.792 K6.5
PTT_3С: K6.3 K6.10 X1.3 | length 30.1
  Bottom Layer w0.4: K6.3 52.514,77.825 58.975,77.825 62.149,80.999 71.511,80.999 X1.3
  Bottom Layer w1: K6.10 50.481,70.752 50.481,75.792 K6.3
PTT_4N: J5.7 K8.4 K8.9 | length 28.1
  Top Layer w0.5: K8.4 55.313,68.95 58.21,68.95 59.902,70.643 59.902,75.672 63.98,79.749 J5.7
  Top Layer w1.5: K8.9 53.021,61.618 53.021,66.657 K8.4
PTT_4P: J5.8 K8.5 K8.8 | length 28.4
  Top Layer w0.3: 66.4,78.475 68.996,78.475 J5.8
  Top Layer w0.5: K8.5 57.728,66.678 60.884,69.834 60.884,75.282 64.077,78.475 66.4,78.475
  Top Layer w1.5: K8.8 55.561,61.618 55.561,66.657 K8.5
PTT_4С: K8.3 K8.10 X1.4 | length 35.5
  Bottom Layer w0.4: K8.3 52.495,68.672 57.591,68.672 58.7,69.781 58.7,74.425 62.75,78.475 71.526,78.475 X1.4
  Bottom Layer w1: K8.10 50.481,61.618 50.481,66.657 K8.3
PTT_5N: J5.9 K10.4 K10.9 | length 33.3
  Top Layer w0.5: K10.4 55.372,59.875 57.425,59.875 58.55,61 58.55,65.05 62.125,68.625 62.125,73.656 65.678,77.209 J5.9
  Top Layer w1.5: K10.9 53.021,52.484 53.021,57.523 K10.4
PTT_5P: J5.10 K10.5 K10.8 | length 33.7
  Top Layer w0.5: K10.5 57.269,57.544 59.4,59.675 59.4,64.769 62.925,68.294 62.925,73.075 64.8,74.95 68.011,74.95 J5.10
  Top Layer w1.5: K10.8 55.561,52.484 55.561,57.523 K10.5
PTT_5С: K10.3 K10.10 X1.5 | length 42.3
  Bottom Layer w0.4: K10.3 52.507,59.55 57.825,59.55 59.625,61.35 59.625,72.95 61.8,75.125 70.716,75.125 X1.5
  Bottom Layer w1: K10.10 50.481,52.484 50.481,57.523 K10.3
PTT_12V: C6.1 C8.1 C10.1 C12.1 C14.1 K2.12 K4.12 K6.12 K8.12 K10.12 VD2.2 VD4.2 VD6.2 VD8.2 VD10.2 VT1.3 | length 118.2
  Top Layer w0.6: VT1.3 v2@13.591,55.891 ; C14.1 39.778,54.549 40.13,54.197 VD10.2 42.189,52.815 42.54,52.464 K10.12 ; C12.1 39.778,63.653 40.13,63.302 42.189,63.302 42.189,61.949 42.54,61.598 K8.12 ; C10.1 39.778,72.776 40.13,72.425 VD6.2 42.189,71.111 42.568,70.732 K6.12 ; C6.1 39.778,81.975 40.13,81.624 VD2.2 42.189,80.311 42.634,79.866 K2.12 ; C8.1 39.778,91.089 40.13,90.737 42.289,90.737 42.289,89.351 42.64,89 K4.12
  Bottom Layer w0.6: v2(13.673,55.9) 17.047,59.275 43.075,59.275 ; K10.12 43.075,54.769 43.075,59.275 ; K8.12 43.102,61.598 43.075,61.625 ; K6.12 43.082,70.732 43.075,70.725 ; K2.12 43.141,79.866 43.075,79.8 ; K4.12 43.075,86.695 43.075,79.8 ; 43.075,59.275 43.075,61.625 ; 43.075,61.625 43.075,70.725 ; 43.075,70.725 43.075,79.8
RF_1: J6.1 K1.4 K1.9 | length 37.3
  Top Layer w1.5: K1.9 53.021,43.35 53.021,45.925 ; K1.4 53.021,48.389 53.021,45.925 ; J6.1 69,60.954 67.971,59.925 63.925,59.925 62.65,58.65 62.65,49.8 59.836,46.986 58.775,45.925 53.021,45.925
RF_2: J7.1 K3.4 K3.9 | length 34.1
  Top Layer w1.5: K3.9 53.021,34.216 53.021,36.75 ; K3.4 53.021,39.255 53.021,36.75 ; J7.1 69,49.825 67.65,48.475 66.031,48.475 62.848,45.292 62.848,39.715 59.883,36.75 53.021,36.75
RF_3: J8.1 K5.4 K5.9 | length 33.2
  Top Layer w1.5: K5.9 53.021,25.082 53.021,27.625 ; K5.4 53.021,30.121 53.021,27.625 ; J8.1 69,37.775 67.825,36.6 64.662,36.6 62.625,34.563 62.625,29.275 60.974,27.625 53.021,27.625
RF_4: J9.1 K7.4 K7.9 | length 31.4
  Top Layer w1.5: K7.9 53.021,15.948 53.021,18.467 ; K7.4 53.021,20.987 53.021,18.467 ; J9.1 69,26.325 67.9,25.225 63.545,25.225 62.01,23.69 62.01,19.61 60.867,18.467 53.021,18.467
RF_5: J10.1 K9.4 K9.9 | length 28.8
  Top Layer w1.5: K9.9 53.021,6.814 53.021,9.333 ; K9.4 53.021,11.853 53.021,9.333 ; J10.1 69,13.329 68.121,12.45 63.8,12.45 60.683,9.333 53.021,9.333
TUNE: J1.6 J4.9 | length 61.7
  Top Layer w0.4: J4.9 28.11,89.898 28.11,85.365 v2(28.125,85.35)
  Bottom Layer w0.4: J1.6 2.275,47.641 2.275,57.35 6.25,61.325 16.9,71.975 26.525,71.975 28.125,73.575 v2(28.125,85.35)
pads on no net: C1. C3. IC1. IC2.32 IC3.32 U1. VT1. VT2.

## Polygon pours and split planes (outlines as drawn)
GND on Top Layer "Top" (solid, remove dead copper, pour order 0): 0,100 81.5,100 81.5,0 0,0
GND on Bottom Layer "Top" (solid, remove dead copper, pour order 1): 0,100 81.5,100 81.5,0 0,0

## Keep-outs
Keep-Out Layer:
  lines w0.2: 0,95 cw(c5,95) 5,100 76.5,100 cw(c76.5,95) 81.5,95 81.5,5 cw(c76.5,5) 76.5,0 5,0 cw(c5,5) 0,5 0,95.469

## Other copper
Top Layer:
  region net +5V: 9.5,12.85 6.5,12.85 6.5,14.25 2.5,14.25 2.5,23.75 9,23.75 9,21.25 13,21.25 13,19.25 9.5,19.25 9.5,16.75

## Silkscreen, mask and mechanical layers (free items; w line width, h text height)
Top Overlay:
  lines w0.2: 0.686,67.574 5.586,67.574 ; 0.786,65.074 5.686,65.074 ; 0.786,70.074 5.686,70.074 ; 0.786,72.574 5.686,72.574 ; 3.186,62.574 3.186,75.074 ; 16.8,96.9 29.3,96.9 ; 16.896,3.194 29.396,3.194 ; 19.3,94.4 19.3,99.3 ; 19.396,0.694 19.396,5.594 ; 21.8,94.5 21.8,99.4 ; 21.896,0.794 21.896,5.694 ; 24.3,94.4 24.3,99.3 ; 24.396,0.694 24.396,5.594 ; 26.8,94.4 26.8,99.3 ; 26.896,0.694 26.896,5.594 ; 74.425,78.5 80.525,78.5 ; 74.425,81 80.475,81 ; 74.425,83.5 80.45,83.5 ; 74.425,86 80.475,86 ; 76.35,76.175 76.35,88.65 ; 78.425,76.175 78.425,88.675 ; 78.425,76.175 74.4,76.175 74.4,88.675 78.425,88.675 ; 78.425,76.175 80.525,76.175 80.525,88.675 78.425,88.675 ; 0.686,62.574 0.686,75.074 5.686,75.074 5.686,62.574 0.686,62.574 ; 16.8,94.4 29.3,94.4 29.3,99.4 16.8,99.4 16.8,94.4 ; 16.896,0.694 29.396,0.694 29.396,5.694 16.896,5.694 16.896,0.694
  text "9" at 17.7,97.617 h1.5
  text "11" at 19.9,97.6 h1.5
  text "13" at 22.4,97.617 h1.5
  text "15" at 24.9,97.617 h1.5
  text "G" at 27.5,97.617 h1.5
  text "8" at 17.727,95.217 h1.5
  text "10" at 19.8,95.217 h1.5
  text "TU" at 27.2,95.217 h1.5
  text "12" at 22.3,95.2 h1.5
  text "14" at 24.9,95.2 h1.5
  text "2P" at 77.708,86.499 h1.5 r90
  text "2C" at 79.941,86.468 h1.5 r90
  text "2N" at 75.772,86.45 h1.5 r90
  text "OUTPUTS_2" at 17.7,85.156 h2
  text "1P" at 77.708,84.1 h1.5 r90
  text "1N" at 75.772,84.051 h1.5 r90
  text "1C" at 79.908,84.025 h1.5 r90
  text "3P" at 77.708,81.5 h1.5 r90
  text "3N" at 75.772,81.451 h1.5 r90
  text "3C" at 79.87,81.444 h1.5 r90
  text "PTT" at 65.519,81.005 h2 r90
  text "4P" at 77.704,79 h1.5 r90
  text "4N" at 75.768,78.951 h1.5 r90
  text "4C" at 79.845,78.919 h1.5 r90
  text "5N" at 75.768,76.526 h1.5 r90
  text "5P" at 77.704,76.526 h1.5 r90
  text "5C" at 79.895,76.526 h1.5 r90
  text "Wolf-Adapter rev.1.1 / UA3REO & R7KBI" at 10.775,74.55 h2 r90
  text "+12" at 2.309,72.903 h1.3 r90
  text "+12" at 4.724,72.903 h1.3 r90
  text "G" at 2.45,70.744 h1.5 r90
  text "G" at 4.865,70.719 h1.5 r90
  text "PT" at 4.848,68.074 h1.5 r90
  text "TU" at 2.433,68.025 h1.5 r90
  text "B2" at 4.852,65.574 h1.5 r90
  text "B3" at 2.438,65.525 h1.5 r90
  text "B0" at 4.852,63.163 h1.5 r90
  text "B1" at 2.438,63.025 h1.5 r90
  text "144Mhz" at 75.493,62.841 h2 r90
  text "430Mhz" at 75.471,50.932 h2 r90
  text "TRX" at 2.377,43.959 h2 r90
  text "1.2Ghz" at 75.471,39.801 h2 r90
  text "5.6Ghz" at 75.471,28.074 h2 r90
  text "10Ghz" at 75.471,16.746 h2 r90
  text "OUTPUTS_1" at 18.4,12.656 h2
  text "PT" at 17.4,3.9 h1.5
  text "6" at 20.3,3.917 h1.5
  text "4" at 22.8,3.9 h1.5
  text "2" at 25.299,3.9 h1.5
  text "0" at 28,3.917 h1.5
  text "G" at 17.7,1.517 h1.5
  text "5" at 22.8,1.517 h1.5
  text "3" at 25.3,1.517 h1.5
  text "7" at 20.3,1.5 h1.5
  text "1" at 27.9,1.5 h1.5
  text "TRX_VHF" at 64.114,0.95 h2 r90